# Altium PCB interface.PcbDoc (part 2 of 2)
Units mm, origin at the board's own origin, x right, y up, seen from the top; angles counter-clockwise.
Board outline 50 x 100 mm, 4 copper layers (Top Copper, GND, Supply, Bot Copper), stack 1.56 mm thick; 82 components, 62 nets, 291 pads, 101 vias.
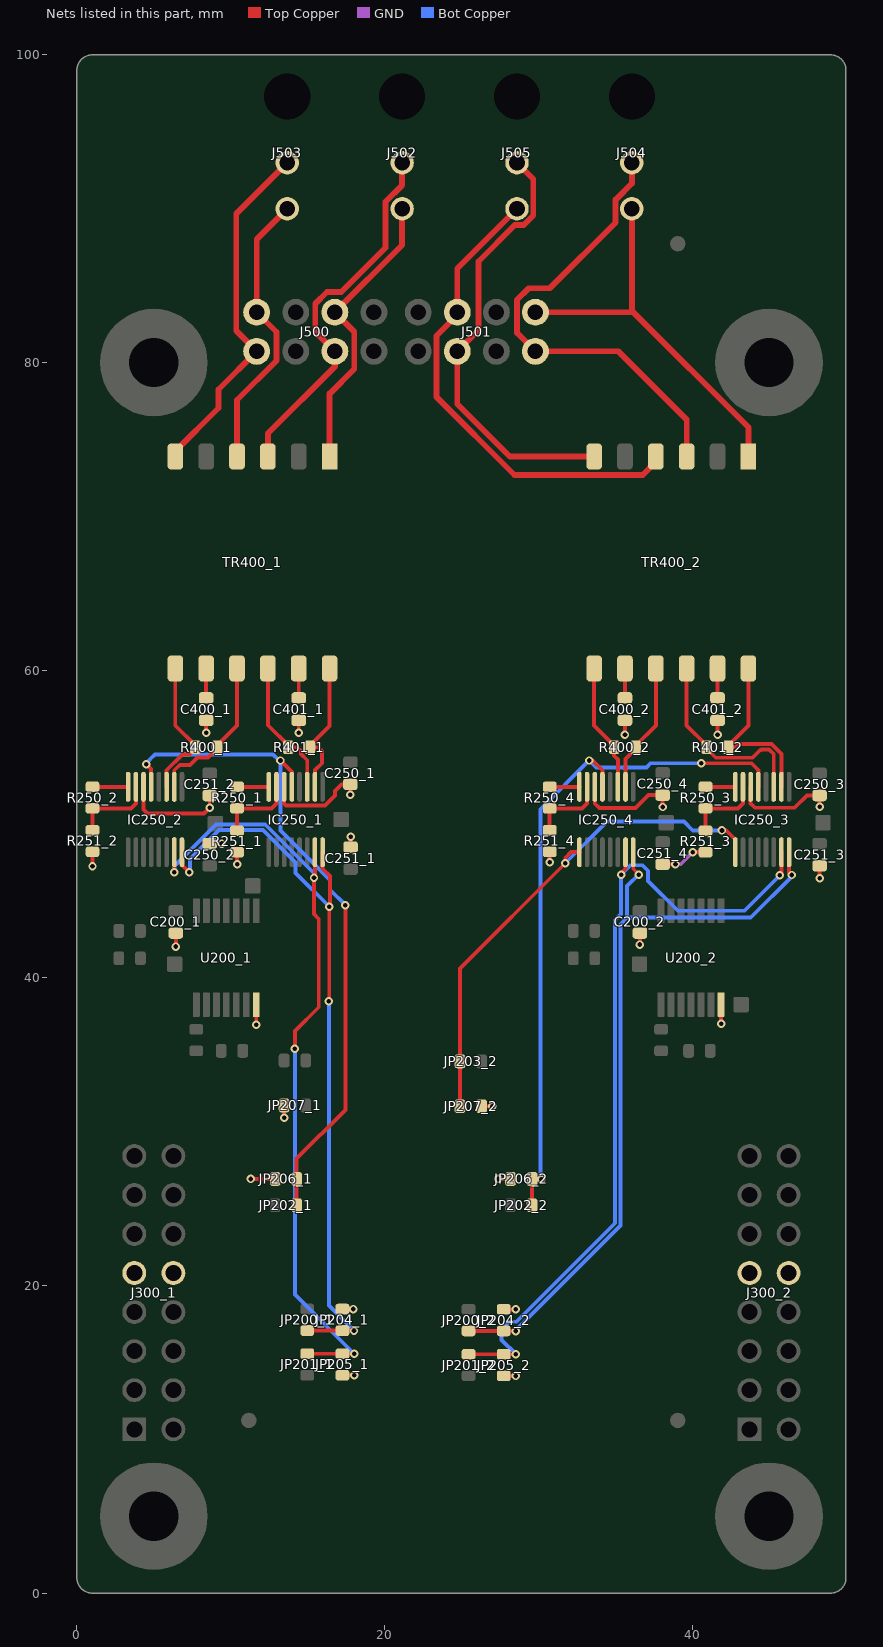
[diagram p4: the nets of this part, all layers, seen from the top]

## Via types
v1: diameter 0.55, hole 0.3, Top Copper to Bot Copper, tented both sides, 101 vias

## Nets (pads, with @x,y where several pads share a name; then routed paths per layer and width w, separated by ;. In a path a pad name is that pad's centre, name@x,y a point inside that pad or via, vN(x,y) a via of type N, cw(c..) or ccw(c..) an arc to the next point about the centre after c; other vN are vias at no path point) (continued)
EN-BACKUP_2: IC250_3.1 IC250_4.1 JP203_2.1 JP207_2.2 | length 33.5
  Top Copper w0.254: JP207_2.2@24.909,31.648 24.909,34.017 JP203_2.1@24.909,34.569 24.909,40.606 v1(31.75,47.447) 31.75,47.803 32.114,48.167 IC250_4.1@32.667,48.167 ; v1(41.935,49.581) 42.213,49.581 42.802,48.992 IC250_3.1@42.802,48.167
  Bot Copper w0.254: v1(31.75,47.447) 34.463,50.161 39.458,50.161 40.038,49.581 v1(41.935,49.581)
GND_0: C200_1.1 C250_1.1 C250_2.1 C251_1.1 C251_2.1 C400_1.1 C401_1.1 IC250_1.14 IC250_2.14 J300_1.9 J300_1.10 JP204_1.1 JP205_1.1 JP206_1.1 JP207_1.1 R251_1.1 R251_2.1 U200_1.7 | length 24.8
  Top Copper w0.254: v1(1.016,47.244) R251_2.1@1.016,48.195 ; IC250_2.14@4.33,52.417 4.33,50.939 4.596,50.673 8.255,50.673 v1(8.636,51.054) C251_2.1@8.636,51.853 C251_2.1@8.536,51.853 ; v1(6.43,42.034) C200_1.1@6.43,42.911 ; v1@8.404,55.88 v1(8.404,55.935) C400_1.1@8.404,56.743 ; C250_2.1@8.636,48.731 v1(9.423,48.731) 9.435,48.731 v1@9.449,48.717 ; v1(10.414,47.371) R251_1.1@10.414,48.167 R251_1.1@10.414,48.195 ; v1(11.303,26.924) JP206_1.1@12.889,26.924 ; v1(11.663,36.961) U200_1.7@11.663,38.261 ; v1@13.41,30.892 13.472,30.954 JP207_1.1@13.472,31.705 ; IC250_1.14@13.474,52.417 13.474,51.34 13.601,51.213 16.131,51.213 16.77,51.853 16.77,52.145 17.203,52.578 C250_1.1@17.78,52.578 v1(17.78,51.906) ; v1(14.423,55.935) C401_1.1@14.423,56.743 ; JP204_1.1@17.264,18.467 v1(17.975,18.467) ; JP205_1.1@17.278,14.149 JP205_1.1@17.264,14.163 v1(18.026,14.163) ; C251_1.1@17.795,48.502 v1(17.795,49.174)
  other v1: 13.472,30.892
GND_1: C200_2.1 C250_3.1 C250_4.1 C251_3.1 C251_4.1 C400_2.1 C401_2.1 IC250_3.14 IC250_4.14 J300_2.9 J300_2.10 JP204_2.1 JP205_2.1 JP206_2.1 JP207_2.1 R251_3.1 R251_4.1 U200_2.7 | length 25.1
  Top Copper w0.254: JP207_2.1@26.309,31.648 v1(27.006,31.648) ; v1(27.381,26.924) JP206_2.1@28.194,26.924 ; JP205_2.1@27.75,14.127 28.526,14.127 v1(28.537,14.116) ; JP204_2.1@27.75,18.448 28.551,18.448 v1@28.563,18.459 ; v1(30.738,47.52) R251_4.1@30.738,48.195 ; IC250_4.14@33.667,52.417 33.667,51.34 33.979,51.029 36.322,51.029 37.172,51.878 C250_4.1@38.075,51.878 v1(38.075,51.105) ; v1(35.63,55.808) C400_2.1@35.63,56.743 ; v1(36.602,42.164) C200_2.1@36.602,42.911 ; C251_4.1@38.075,47.383 v1(38.913,47.383) ; v1(40.039,48.167) R251_3.1@40.869,48.167 ; v1(41.649,55.808) C401_2.1@41.649,56.743 ; v1(41.882,37.024) U200_2.7@41.882,38.261 ; IC250_3.14@43.802,52.417 43.802,51.34 44.088,51.054 46.66,51.054 47.459,51.853 C250_3.1@48.285,51.853 v1(48.285,51.13) ; v1(48.285,46.482) C251_3.1@48.285,47.281
  GND w0.254: v1@28.512,14.141 v1(28.537,14.116) ; v1(38.913,47.383) 39.255,47.383 v1(40.039,48.167) ; v1@48.311,51.156 v1@48.336,51.13
  other v1: 28.537,18.459
NetC400_1_2: C400_1.2 TR400_1.8 | length 1.9
  Top Copper w0.254: C400_1.2@8.404,58.192 TR400_1.8@8.404,60.113
NetC400_2_2: C400_2.2 TR400_2.8 | length 1.9
  Top Copper w0.254: C400_2.2@35.63,58.192 TR400_2.8@35.63,60.113
NetC401_1_2: C401_1.2 TR400_1.11 | length 1.9
  Top Copper w0.254: C401_1.2@14.423,58.192 TR400_1.11@14.423,60.113
NetC401_2_2: C401_2.2 TR400_2.11 | length 1.9
  Top Copper w0.254: C401_2.2@41.649,58.192 TR400_2.11@41.649,60.113
NetIC250_1_15: IC250_1.15 R250_1.1 R251_1.2 | length 5.2
  Top Copper w0.254: R251_1.2@10.414,49.567 R250_1.1@10.414,51.017 12.651,51.017 12.974,51.34 IC250_1.15@12.974,52.417
NetIC250_1_16: IC250_1.16 R250_1.2 | length 2.1
  Top Copper w0.254: R250_1.2@10.414,52.417 IC250_1.16@12.474,52.417
NetIC250_2_15: IC250_2.15 R250_2.1 R251_2.2 | length 5.4
  Top Copper w0.254: R251_2.2@1.016,49.595 R250_2.1@1.016,51.017 3.507,51.017 3.83,51.34 IC250_2.15@3.83,52.417
NetIC250_2_16: IC250_2.16 R250_2.2 | length 2.3
  Top Copper w0.254: R250_2.2@1.016,52.417 IC250_2.16@3.33,52.417
NetIC250_3_15: IC250_3.15 R250_3.1 R251_3.2 | length 5.1
  Top Copper w0.254: R251_3.2@40.869,49.567 R250_3.1@40.869,51.017 42.978,51.017 43.302,51.34 IC250_3.15@43.302,52.417
NetIC250_3_16: IC250_3.16 R250_3.2 | length 1.9
  Top Copper w0.254: R250_3.2@40.869,52.417 IC250_3.16@42.802,52.417
NetIC250_4_15: IC250_4.15 R250_4.1 R251_4.2 | length 5.1
  Top Copper w0.254: R251_4.2@30.738,49.595 30.738,50.565 R250_4.1@30.738,51.017 32.844,51.017 33.167,51.34 IC250_4.15@33.167,52.417
NetIC250_4_16: IC250_4.16 R250_4.2 | length 1.9
  Top Copper w0.254: R250_4.2@30.738,52.417 IC250_4.16@32.667,52.417
OUT_1_N: IC250_1.10 R401_1.2 TR400_1.12 | length 9
  Top Copper w0.254: IC250_1.10@15.474,52.417 15.474,53.5 15.922,53.949 15.922,54.74 15.672,54.991 R401_1.2@15.146,54.991 15.146,55.091 16.43,56.375 TR400_1.12@16.43,60.113
OUT_1_P: IC250_1.11 R401_1.1 TR400_1.10 | length 9.1
  Top Copper w0.254: TR400_1.10@12.417,60.113 12.417,56.42 13.746,55.091 R401_1.1@13.746,54.991 14.326,54.991 14.568,54.749 14.568,54.549 14.974,54.142 IC250_1.11@14.974,52.417
OUT_2_N: IC250_2.10 R400_1.2 TR400_1.9 | length 10.2
  Top Copper w0.254: IC250_2.10@6.33,52.417 6.33,53.494 6.684,53.848 7.366,53.848 7.83,54.312 8.525,54.312 9.104,54.891 R400_1.2@9.104,54.991 9.104,55.091 10.41,56.398 TR400_1.9@10.41,60.113
OUT_2_P: IC250_2.11 R400_1.1 TR400_1.7 | length 9.3
  Top Copper w0.254: IC250_2.11@5.83,52.417 5.83,53.496 6.854,54.52 7.333,54.52 7.704,54.891 R400_1.1@7.704,54.991 7.704,55.091 6.397,56.398 TR400_1.7@6.397,60.113
OUT_3_N: IC250_3.10 R401_2.2 TR400_2.12 | length 11.6
  Top Copper w0.254: TR400_2.12@43.656,60.113 43.656,56.398 42.349,55.091 R401_2.2@42.349,54.991 42.801,54.991 43,55.19 45.153,55.19 45.802,54.541 IC250_3.10@45.802,52.417
OUT_3_P: IC250_3.11 R401_2.1 TR400_2.10 | length 12.8
  Top Copper w0.254: TR400_2.10@39.643,60.113 39.643,56.398 40.949,55.091 R401_2.1@40.949,54.991 40.949,54.891 41.535,54.305 43.924,54.305 44.428,54.809 44.479,54.809 44.504,54.834 45.005,54.834 45.302,54.538 IC250_3.11@45.302,52.417
OUT_4_N: IC250_4.10 R400_2.2 TR400_2.9 | length 8.5
  Top Copper w0.254: IC250_4.10@35.667,52.417 35.667,54.228 36.33,54.891 R400_2.2@36.33,54.991 36.33,55.091 37.636,56.398 TR400_2.9@37.636,60.113
OUT_4_P: IC250_4.11 R400_2.1 TR400_2.7 | length 8.3
  Top Copper w0.254: TR400_2.7@33.623,60.113 33.623,56.398 34.93,55.091 R400_2.1@34.93,54.991 34.93,54.439 35.167,54.202 IC250_4.11@35.167,52.417
OUT_primary_N: J500.4 J502.2 TR400_1.1 | length 19.1
  Top Copper w0.381: TR400_1.1@16.43,73.892 16.43,77.977 18.034,79.581 18.034,82.006 J500.4@16.77,83.27 21.144,87.644 J502.2@21.144,89.992
OUT_primary_P: J500.3 J502.1 TR400_1.3 | length 24.3
  Top Copper w0.381: TR400_1.3@12.417,73.892 12.417,75.381 16.77,79.734 J500.3@16.77,80.73 15.494,82.006 15.494,83.82 16.256,84.582 17.184,84.582 20.066,87.464 20.066,90.454 21.144,91.532 J502.1@21.144,92.989
OUT_reverse_primary_N: J500.8 J503.2 TR400_1.4 | length 18.5
  Top Copper w0.381: TR400_1.4@10.41,73.892 10.41,77.558 12.974,80.122 12.974,81.985 J500.8@11.69,83.27 11.689,88.006 J503.2@13.676,89.992
OUT_reverse_primary_P: J500.7 J503.1 TR400_1.6 | length 23.2
  Top Copper w0.381: TR400_1.6@6.397,73.892 6.397,74.242 9.203,77.047 9.203,78.243 J500.7@11.69,80.73 10.363,82.057 10.363,89.676 J503.1@13.676,92.989
OUT_reverse_secondary_N: J501.6 J505.2 TR400_2.4 | length 31.5
  Top Copper w0.381: J505.2@28.612,89.992 24.73,86.111 J501.6@24.73,83.27 24.73,83.093 23.368,81.731 23.368,77.775 28.451,72.692 36.785,72.692 37.636,73.543 TR400_2.4@37.636,73.892
OUT_reverse_secondary_P: J501.5 J505.1 TR400_2.6 | length 28.8
  Top Copper w0.381: J505.1@28.612,92.989 29.666,91.935 29.666,89.556 29.048,88.938 28.467,88.938 26.103,86.574 26.103,82.103 J501.5@24.73,80.73 24.73,77.311 28.149,73.892 TR400_2.6@33.623,73.892
OUT_secondary_N: J501.2 J504.2 TR400_2.1 | length 25.5
  Top Copper w0.381: J501.2@29.81,83.27 35.989,83.27 36.079,83.36 ; J504.2@36.079,89.992 36.079,83.36 ; TR400_2.1@43.656,73.892 43.656,75.784 36.079,83.36
OUT_secondary_P: J501.1 J504.1 TR400_2.3 | length 30.7
  Top Copper w0.381: J504.1@36.079,92.989 36.079,91.642 35.025,90.588 35.025,89.11 30.744,84.829 29.367,84.829 28.612,84.074 28.612,81.928 J501.1@29.81,80.73 35.193,80.73 39.643,76.28 TR400_2.3@39.643,73.892
PHA_1: IC250_1.8 IC250_2.8 JP200_1.1 JP204_1.2 | length 49.7
  Top Copper w0.254: IC250_2.8@6.83,48.167 6.83,47.342 v1(7.309,46.863) ; JP200_1.1@14.978,17.067 v1(18.015,17.067) ; IC250_1.8@15.974,48.167 15.974,47.09 16.455,46.609 v1@16.455,44.628 ; v1(16.383,38.481) 16.408,38.506 v1(16.408,44.628)
  Bot Copper w0.254: v1(7.309,46.863) 7.356,46.91 7.356,47.721 9.246,49.611 12.096,49.611 14.219,47.488 14.219,46.817 v1(16.408,44.628) ; v1(16.383,38.481) 16.383,18.699 v1(18.015,17.067) v1@18.015,17.039
PHA_2: IC250_3.8 IC250_4.8 JP200_2.1 JP204_2.2 | length 51.1
  Top Copper w0.254: JP200_2.1@25.464,17.048 27.198,17.048 JP204_2.2@27.75,17.048 28.526,17.048 v1(28.537,17.037) ; IC250_4.8@36.167,48.167 36.167,47.09 36.496,46.761 v1@36.525,46.761 ; IC250_3.8@46.302,48.167 46.302,46.866 v1(46.482,46.685)
  Bot Copper w0.254: v1(28.537,17.037) 28.537,17.101 35.333,23.897 35.333,43.476 35.774,43.917 ; v1(36.525,46.711) 35.774,45.96 35.774,43.917 ; v1@36.525,46.761 v1@36.525,46.787 ; v1(46.482,46.685) 46.482,46.591 43.807,43.917 35.774,43.917
POL_1: IC250_1.7 IC250_2.7 JP201_1.1 JP205_1.2 | length 51.3
  Top Copper w0.254: v1@6.33,47.09 IC250_2.7@6.33,48.167 ; v1(14.172,35.388) 14.172,36.536 15.723,38.087 15.723,43.837 15.415,44.145 v1(15.415,46.494) 15.474,46.553 IC250_1.7@15.474,48.167 ; JP201_1.1@14.978,15.563 16.712,15.563 JP205_1.2@17.264,15.563 18.009,15.563 v1@18.026,15.546
  Bot Copper w0.254: v1@6.35,46.863 6.35,47.276 9.041,49.967 12.244,49.967 15.415,46.796 v1(15.415,46.494) ; v1(14.172,35.388) 14.172,19.417 v1(18.026,15.563)
  other v1: 6.33,46.863
POL_2: IC250_3.7 IC250_4.7 JP201_2.1 JP205_2.2 | length 54.5
  Top Copper w0.254: JP201_2.1@25.464,15.527 27.198,15.527 JP205_2.2@27.75,15.527 28.602,15.527 v1@28.613,15.538 ; v1(35.382,46.711) 35.382,46.806 35.667,47.09 IC250_4.7@35.667,48.167 ; v1(45.695,46.66) 45.802,46.767 IC250_3.7@45.802,48.167
  Bot Copper w0.254: v1(28.537,15.538) 27.612,16.464 27.612,17.156 28.098,17.642 28.576,17.642 34.978,24.044 34.978,43.754 35.382,44.158 v1(35.382,46.711) 35.987,47.316 36.776,47.316 37.13,46.961 37.13,46.307 39.076,44.361 43.396,44.361 v1(45.695,46.66)
SLOW_1: IC250_1.13 IC250_2.13 JP202_1.1 JP206_1.2 | length 44.8
  Top Copper w0.254: v1(4.521,53.873) 4.83,53.565 IC250_2.13@4.83,52.417 ; v1(13.233,54.127) 13.974,53.387 IC250_1.13@13.974,52.417 ; JP202_1.1@14.289,25.22 14.289,26.372 JP206_1.2@14.289,26.924 14.289,28.259 17.45,31.42 v1(17.45,44.729)
  Bot Copper w0.254: v1(4.521,53.873) 4.521,53.953 4.729,54.161 4.729,54.175 5.083,54.529 12.751,54.529 13.153,54.127 v1(13.233,54.127) 13.233,49.568 16.451,46.35 16.451,45.728 v1(17.45,44.729)
SLOW_2: IC250_3.13 IC250_4.13 JP202_2.1 JP206_2.2 | length 45.6
  Top Copper w0.254: JP202_2.1@29.594,25.22 29.594,25.771 JP206_2.2@29.594,26.924 30.179,26.924 v1(30.19,26.913) ; v1(33.299,54.127) 33.533,54.127 34.167,53.494 IC250_4.13@34.167,52.417 ; v1(40.589,53.95) 43.846,53.95 44.302,53.494 IC250_3.13@44.302,52.417
  Bot Copper w0.254: v1(30.19,26.913) 30.133,26.971 30.133,50.961 v1(33.299,54.127) 33.322,54.127 33.774,53.675 37.02,53.675 37.295,53.95 v1(40.589,53.95)
pads on no net: Designator11.Hole_3.2 Designator12.Hole_3.2 Designator13.Hole_3.2 Designator14.Hole_3.2 Designator38.0 Designator39.0 Designator40.0 J300_1.2 J300_1.11 J300_1.12 J300_1.13 J300_1.14 J300_1.15 J300_1.16 J300_2.2 J300_2.11 J300_2.12 J300_2.13 J300_2.14 J300_2.15 J300_2.16 J500.1 J500.2 J500.5 J500.6 J501.3 J501.4 J501.7 J501.8 J502. J503. J504. J505. TR400_1.2 TR400_1.5 TR400_2.2 TR400_2.5

## Polygon pours and split planes (outlines as drawn)
no net on Bottom Overlay "Polygon_10_NoNet" (solid): 17.279,34.283 17.279,34.578 15.874,34.577 15.875,34.282
no net on Bottom Overlay "Polygon_9_NoNet" (solid): 17.279,34.916 17.279,35.2 15.874,35.2 15.876,34.917
no net on Bottom Overlay "Polygon_8_NoNet" (solid): 17.002,36.272 17.256,36.295 17.281,36.198 17.3,36.097 17.303,36.054 17.3,35.889 17.278,35.781 17.237,35.676 17.177,35.599 17.088,35.535 17.005,35.501 16.931,35.491 16.795,35.489 16.712,35.518 16.642,35.56 16.563,35.648 16.51,35.736 16.462,35.841 16.43,35.923 16.39,35.998 16.347,36.045 16.322,36.065 16.288,36.073 16.221,36.074 16.169,36.043 16.13,35.999 16.109,35.95 16.093,35.905 16.09,35.846 16.097,35.76 16.112,35.696 16.128,35.644 16.149,35.608 16.177,35.539 15.907,35.515 15.882,35.598 15.862,35.703 15.852,35.769 15.852,35.955 15.872,36.064 15.921,36.177 15.967,36.253 16.038,36.317 16.126,36.354 16.22,36.377 16.351,36.375 16.466,36.344 16.562,36.269 16.641,36.165 16.701,36.026 16.747,35.92 16.777,35.857 16.835,35.802 16.869,35.791 16.958,35.8 17.023,35.85 17.059,35.913 17.061,36.067 17.045,36.141
no net on Bottom Overlay "Polygon_7_NoNet" (solid): 17.04,37.091 17.042,37.141 17.016,37.2 16.985,37.246 16.945,37.27 16.84,37.274 16.814,37.266 16.788,37.247 16.762,37.21 16.738,37.161 16.724,37.095 16.724,36.962 16.492,36.976 16.495,37.151 16.471,37.212 16.425,37.274 16.381,37.302 16.353,37.313 16.247,37.313 16.204,37.294 16.165,37.259 16.141,37.202 16.118,37.142 16.118,36.955 15.877,36.949 15.878,37.178 15.89,37.28 15.959,37.458 16.088,37.575 16.261,37.612 16.394,37.594 16.493,37.544 16.563,37.46 16.603,37.369 16.609,37.331 16.626,37.384 16.685,37.473 16.774,37.538 16.868,37.564 16.966,37.564 17.094,37.529 17.181,37.473 17.247,37.36 17.277,37.242 17.283,37.081 17.281,36.644 15.875,36.646 15.876,36.949 16.117,36.955 16.117,36.931 16.49,36.934 16.49,36.976 16.723,36.962 16.723,36.936 17.038,36.929
no net on Bottom Overlay "Polygon_22_NoNet" (solid): 14.03,62.802 13.89,62.778 13.784,62.709 13.715,62.603 13.691,62.464 13.691,60.04 13.715,59.9 13.784,59.794 13.89,59.726 14.03,59.701 14.302,59.646 14.525,59.495 14.676,59.272 14.731,59 14.731,58.481 14.76,58.342 14.837,58.235 14.945,58.166 15.069,58.142 24.547,58.142 24.578,57.778 15.068,57.778 14.928,57.792 14.796,57.833 14.677,57.898 14.573,57.984 14.487,58.088 14.422,58.207 14.381,58.339 14.367,58.479 14.367,58.998 14.342,59.138 14.274,59.244 14.167,59.313 14.028,59.337 13.887,59.351 13.756,59.393 13.637,59.457 13.533,59.543 13.447,59.647 13.382,59.766 13.341,59.898 13.326,60.038 13.326,62.465 13.34,62.607 13.381,62.74 13.444,62.86 13.529,62.963 13.633,63.048 13.753,63.112 13.885,63.152 14.027,63.166 14.167,63.192 14.274,63.264 14.342,63.371 14.367,63.504 14.367,64.024 14.381,64.164 14.422,64.296 14.487,64.415 14.573,64.52 14.677,64.605 14.796,64.67 14.928,64.711 15.068,64.725 34.14,64.725 34.3,64.713 34.442,64.675 34.562,64.614 34.662,64.532 34.74,64.43 34.796,64.31 34.831,64.174 34.842,64.024 34.842,58.479 34.828,58.339 34.787,58.207 34.722,58.088 34.636,57.984 34.532,57.898 34.412,57.833 34.281,57.792 34.14,57.778 24.578,57.778 24.547,58.142 34.138,58.142 34.278,58.166 34.385,58.235 34.453,58.341 34.478,58.48 34.478,64.022 34.453,64.162 34.385,64.268 34.278,64.337 34.14,64.361 15.07,64.361 14.93,64.337 14.824,64.268 14.755,64.162 14.731,64.024 14.731,63.503 14.676,63.231 14.525,63.008 14.302,62.857
no net on Bottom Overlay "Polygon_45_NoNet" (solid, pour order 1): 33.47,7.144 33.466,7.206 33.454,7.26 33.433,7.306 33.404,7.344 33.366,7.374 33.32,7.395 33.267,7.408 33.206,7.411 33.145,7.408 33.092,7.395 33.046,7.374 33.008,7.344 32.979,7.306 32.958,7.26 32.946,7.206 32.941,7.144 32.946,7.083 32.958,7.03 32.979,6.984 33.008,6.946 33.046,6.917 33.092,6.896 33.145,6.884 33.206,6.88 33.267,6.884 33.32,6.896 33.366,6.917 33.404,6.946 33.433,6.984 33.454,7.03 33.466,7.083
no net on Bottom Overlay "Polygon_44_NoNet" (solid, pour order 6): 32.706,6.681 32.706,5.928 32.913,5.928 32.913,5.051 33.499,5.051 33.499,5.928 33.706,5.928 33.706,6.681 33.696,6.729 33.668,6.771 33.626,6.799 33.578,6.808 32.834,6.808 32.787,6.799 32.745,6.771 32.716,6.73
no net on Bottom Overlay "Polygon_43_NoNet" (solid, pour order 16): 33.231,8.051 33.021,8.042 32.841,8.017 32.668,7.976 32.503,7.919 32.345,7.845 32.195,7.754 32.052,7.647 31.917,7.524 31.793,7.388 31.685,7.245 31.594,7.094 31.519,6.936 31.461,6.771 31.42,6.598 31.395,6.418 31.387,6.231 31.395,6.044 31.419,5.864 31.46,5.693 31.517,5.529 31.59,5.373 31.68,5.226 31.785,5.086 31.907,4.955 32.048,4.828 32.195,4.717 32.349,4.624 32.508,4.548 32.674,4.489 32.846,4.446 33.025,4.421 33.209,4.412 33.39,4.421 33.565,4.446 33.735,4.488 33.898,4.546 34.055,4.622 34.206,4.714 34.35,4.823 34.489,4.948 34.614,5.086 34.723,5.229 34.815,5.38 34.891,5.537 34.949,5.701 34.991,5.871 35.016,6.048 35.025,6.231 35.016,6.415 34.991,6.592 34.949,6.763 34.891,6.928 34.815,7.087 34.723,7.239 34.614,7.384 34.489,7.524 34.354,7.647 34.212,7.754 34.062,7.845 33.906,7.919 33.742,7.976 33.572,8.017 33.394,8.042 33.272,8.052 33.208,8.05 33.225,7.698 33.352,7.692 33.496,7.672 33.634,7.639 33.766,7.592 33.892,7.532 34.012,7.459 34.126,7.371 34.235,7.271 34.338,7.157 34.427,7.038 34.502,6.915 34.564,6.787 34.612,6.655 34.646,6.519 34.667,6.378 34.674,6.232 34.667,6.086 34.647,5.944 34.613,5.808 34.565,5.677 34.504,5.551 34.429,5.43 34.341,5.313 34.239,5.202 34.128,5.1 34.011,5.012 33.89,4.937 33.763,4.876 33.631,4.828 33.494,4.794 33.351,4.774 33.203,4.767 33.056,4.774 32.914,4.794 32.776,4.828 32.644,4.876 32.516,4.937 32.393,5.013 32.274,5.102 32.161,5.205 32.062,5.309 31.976,5.421 31.903,5.539 31.844,5.664 31.798,5.795 31.765,5.934 31.745,6.079 31.738,6.231 31.745,6.381 31.765,6.525 31.798,6.663 31.845,6.796 31.905,6.923 31.979,7.044 32.066,7.16 32.166,7.27 32.276,7.371 32.392,7.458 32.513,7.532 32.639,7.592 32.772,7.639 32.909,7.672 33.053,7.692 33.185,7.699 33.25,7.697
no net on Bottom Overlay "Polygon_39_NoNet" (solid, pour order 2): 36.346,6.526 36.607,6.389 36.656,6.465 36.705,6.507 36.757,6.53 36.807,6.538 36.86,6.533 36.907,6.519 36.946,6.495 36.977,6.463 37.003,6.42 37.02,6.369 37.032,6.305 37.036,6.232 37.032,6.165 37.021,6.105 37.003,6.052 36.976,6.006 36.944,5.971 36.905,5.945 36.86,5.93 36.806,5.925 36.737,5.934 36.679,5.961 36.632,6.007 36.589,6.083 36.339,5.959 36.388,5.883 36.436,5.827 36.49,5.777 36.551,5.735 36.617,5.701 36.686,5.677 36.757,5.662 36.832,5.657 36.951,5.667 37.057,5.695 37.151,5.743 37.233,5.809 37.299,5.893 37.346,5.991 37.374,6.104 37.383,6.231 37.374,6.355 37.345,6.467 37.297,6.565 37.23,6.65 37.148,6.717 37.055,6.766 36.953,6.795 36.842,6.805 36.759,6.801 36.683,6.788 36.613,6.768 36.548,6.738 36.49,6.7 36.438,6.654 36.392,6.6
no net on Bottom Overlay "Polygon_38_NoNet" (solid, pour order 3): 37.388,6.526 37.652,6.389 37.701,6.465 37.75,6.507 37.801,6.53 37.848,6.538 37.902,6.533 37.949,6.519 37.987,6.495 38.019,6.463 38.044,6.422 38.062,6.369 38.073,6.305 38.077,6.233 38.062,6.103 38.045,6.052 38.018,6.006 37.986,5.971 37.947,5.945 37.901,5.93 37.848,5.925 37.778,5.934 37.72,5.961 37.674,6.007 37.63,6.083 37.385,5.959 37.431,5.884 37.478,5.827 37.532,5.777 37.593,5.735 37.659,5.701 37.729,5.677 37.801,5.662 37.877,5.657 37.994,5.667 38.1,5.695 38.194,5.743 38.276,5.809 38.343,5.893 38.391,5.991 38.419,6.104 38.428,6.231 38.419,6.355 38.39,6.467 38.342,6.565 38.275,6.65 38.193,6.717 38.101,6.766 37.998,6.795 37.887,6.805 37.804,6.801 37.728,6.788 37.657,6.768 37.593,6.738 37.534,6.701 37.481,6.654 37.435,6.6
no net on Bottom Overlay "Polygon_37_NoNet" (solid, pour order 14): 37.397,8.05 37.203,8.042 37.023,8.017 36.85,7.975 36.684,7.917 36.525,7.842 36.373,7.75 36.228,7.642 36.091,7.517 35.97,7.384 35.865,7.242 35.775,7.091 35.701,6.931 35.643,6.764 35.601,6.591 35.576,6.414 35.568,6.231 35.576,6.047 35.601,5.87 35.642,5.697 35.699,5.531 35.773,5.373 35.862,5.224 35.967,5.085 36.088,4.955 36.225,4.831 36.372,4.722 36.527,4.629 36.692,4.552 36.862,4.491 37.035,4.447 37.211,4.421 37.39,4.412 37.568,4.421 37.743,4.447 37.913,4.49 38.08,4.55 38.241,4.627 38.393,4.719 38.536,4.827 38.671,4.95 38.794,5.085 38.901,5.228 38.993,5.379 39.069,5.539 39.129,5.705 39.171,5.876 39.197,6.052 39.205,6.231 39.197,6.41 39.171,6.585 39.128,6.757 39.068,6.925 38.991,7.087 38.898,7.24 38.79,7.385 38.667,7.521 38.533,7.645 38.392,7.752 38.243,7.843 38.087,7.918 37.924,7.976 37.753,8.017 37.576,8.042 37.456,8.05 37.397,8.05 37.399,7.701 37.533,7.692 37.678,7.672 37.816,7.639 37.948,7.592 38.074,7.532 38.194,7.458 38.308,7.371 38.416,7.271 38.515,7.16 38.603,7.043 38.678,6.92 38.741,6.79 38.791,6.655 38.826,6.517 38.847,6.376 38.854,6.232 38.847,6.089 38.826,5.949 38.791,5.812 38.741,5.677 38.678,5.547 38.603,5.424 38.516,5.309 38.417,5.2 38.308,5.102 38.192,5.015 38.07,4.942 37.94,4.88 37.806,4.832 37.669,4.797 37.528,4.777 37.384,4.77 37.241,4.777 37.101,4.798 36.962,4.832 36.826,4.881 36.694,4.944 36.569,5.018 36.45,5.105 36.338,5.204 36.24,5.31 36.155,5.422 36.083,5.54 36.024,5.665 35.978,5.796 35.945,5.935 35.925,6.079 35.919,6.231 35.926,6.377 35.946,6.52 35.98,6.659 36.027,6.793 36.088,6.922 36.161,7.044 36.246,7.159 36.344,7.267 36.454,7.368 36.57,7.456 36.692,7.53 36.819,7.591 36.952,7.638 37.09,7.672 37.234,7.692 37.334,7.701 37.399,7.702
no net on Bottom Overlay "Polygon_42_NoNet" (solid, pour order 0): 33.47,7.144 33.466,7.206 33.454,7.26 33.433,7.306 33.404,7.344 33.366,7.374 33.32,7.395 33.267,7.408 33.206,7.411 33.145,7.408 33.092,7.395 33.046,7.374 33.008,7.344 32.979,7.306 32.958,7.26 32.946,7.206 32.941,7.144 32.946,7.083 32.958,7.03 32.979,6.984 33.008,6.946 33.046,6.917 33.092,6.896 33.145,6.884 33.206,6.88 33.267,6.884 33.32,6.896 33.366,6.917 33.404,6.946 33.433,6.984 33.454,7.03 33.466,7.083
no net on Bottom Overlay "Polygon_41_NoNet" (solid, pour order 7): 32.706,6.681 32.706,5.928 32.913,5.928 32.913,5.051 33.499,5.051 33.499,5.928 33.706,5.928 33.706,6.681 33.696,6.729 33.668,6.771 33.626,6.799 33.578,6.808 32.834,6.808 32.787,6.799 32.745,6.771 32.716,6.73
no net on Bottom Overlay "Polygon_40_NoNet" (solid, pour order 15): 33.208,8.05 33.021,8.042 32.841,8.017 32.668,7.976 32.503,7.919 32.345,7.845 32.195,7.754 32.052,7.647 31.917,7.524 31.793,7.388 31.685,7.245 31.594,7.094 31.519,6.936 31.461,6.771 31.42,6.598 31.395,6.418 31.387,6.231 31.395,6.044 31.419,5.864 31.46,5.693 31.517,5.529 31.59,5.373 31.68,5.226 31.785,5.086 31.907,4.955 32.048,4.828 32.195,4.717 32.349,4.624 32.508,4.548 32.674,4.489 32.846,4.446 33.025,4.421 33.209,4.412 33.39,4.421 33.565,4.446 33.735,4.488 33.898,4.546 34.055,4.622 34.206,4.714 34.35,4.823 34.489,4.948 34.614,5.086 34.723,5.229 34.815,5.38 34.891,5.537 34.949,5.701 34.991,5.871 35.016,6.048 35.025,6.231 35.016,6.415 34.991,6.592 34.949,6.763 34.891,6.928 34.815,7.087 34.723,7.239 34.614,7.384 34.489,7.524 34.354,7.647 34.212,7.754 34.062,7.845 33.906,7.919 33.742,7.976 33.572,8.017 33.394,8.042 33.272,8.052 33.208,8.05 33.225,7.698 33.352,7.692 33.496,7.672 33.634,7.639 33.766,7.592 33.892,7.532 34.012,7.459 34.126,7.371 34.235,7.271 34.338,7.157 34.427,7.038 34.502,6.915 34.564,6.787 34.612,6.655 34.646,6.519 34.667,6.378 34.674,6.232 34.667,6.086 34.647,5.944 34.613,5.808 34.565,5.677 34.504,5.551 34.429,5.43 34.341,5.313 34.239,5.202 34.128,5.1 34.011,5.012 33.89,4.937 33.763,4.876 33.631,4.828 33.494,4.794 33.351,4.774 33.203,4.767 33.056,4.774 32.914,4.794 32.776,4.828 32.644,4.876 32.516,4.937 32.393,5.013 32.274,5.102 32.161,5.205 32.062,5.309 31.976,5.421 31.903,5.539 31.844,5.664 31.798,5.795 31.765,5.934 31.745,6.079 31.738,6.231 31.745,6.381 31.765,6.525 31.798,6.663 31.845,6.796 31.905,6.923 31.979,7.044 32.066,7.16 32.166,7.27 32.276,7.371 32.392,7.458 32.513,7.532 32.639,7.592 32.772,7.639 32.909,7.672 33.053,7.692 33.185,7.699 33.225,7.698
GND_0 on GND "Polygon_1_Net_GND_0" (solid, remove dead copper, pour order 46): -0.076,-0.076 -0.076,57.406 18.669,57.406 18.674,-0.076
GND_1 on GND "Polygon_1_Net_GND_1" (solid, remove dead copper, pour order 48): 22.826,-0.076 22.783,57.407 50.076,57.406 50.076,-0.076
no net on Top Overlay "Polygon_22_NoNet" (solid): 34.718,6.795 34.858,6.77 34.964,6.702 35.033,6.595 35.057,6.457 35.057,4.033 35.033,3.893 34.964,3.786 34.858,3.718 34.718,3.693 34.447,3.638 34.223,3.488 34.072,3.264 34.017,2.993 34.017,2.473 33.988,2.334 33.911,2.227 33.803,2.159 33.679,2.134 24.201,2.134 24.17,1.77 33.68,1.77 33.82,1.784 33.952,1.825 34.071,1.891 34.175,1.976 34.261,2.08 34.326,2.199 34.367,2.331 34.382,2.472 34.381,2.99 34.406,3.131 34.474,3.237 34.581,3.305 34.72,3.33 34.861,3.344 34.992,3.385 35.111,3.45 35.216,3.535 35.301,3.64 35.366,3.759 35.407,3.89 35.422,4.031 35.422,6.457 35.408,6.6 35.367,6.733 35.304,6.852 35.219,6.955 35.115,7.041 34.996,7.105 34.863,7.144 34.721,7.158 34.581,7.185 34.475,7.256 34.406,7.364 34.382,7.496 34.382,8.016 34.367,8.157 34.326,8.288 34.261,8.408 34.175,8.512 34.071,8.598 33.952,8.662 33.82,8.704 33.68,8.718 14.608,8.718 14.448,8.705 14.306,8.668 14.186,8.607 14.086,8.524 14.008,8.423 13.952,8.302 13.917,8.166 13.906,8.016 13.906,2.472 13.92,2.331 13.961,2.199 14.026,2.08 14.112,1.976 14.216,1.891 14.336,1.825 14.467,1.784 14.608,1.77 24.17,1.77 24.201,2.134 14.61,2.134 14.47,2.159 14.363,2.227 14.295,2.333 14.27,2.472 14.27,8.014 14.295,8.154 14.363,8.261 14.47,8.329 14.608,8.354 33.678,8.354 33.818,8.329 33.924,8.261 33.993,8.154 34.017,8.016 34.017,7.495 34.072,7.224 34.223,7 34.447,6.85
+3.3V_0 on Supply "Polygon_1_Net_+3.3V_0" (solid, remove dead copper, pour order 45): -0.076,-0.076 -0.076,57.406 18.669,57.406 18.669,-0.076
+3.3V_1 on Supply "Polygon_1_Net_+3.3V_1" (solid, remove dead copper, pour order 47): 22.826,-0.076 22.783,57.407 50.076,57.406 50.076,-0.076

## Keep-outs
Top Copper:
  rectangle: 20.4,40.2 29.6,62
Keep-Out Layer:
  lines w0: 0,1 0,99 cw(c1,99) 1,100 49,100 cw(c49,99) 50,99 50,1 cw(c49,1) 49,0 1,0

## Silkscreen, mask and mechanical layers (free items; w line width, h text height)
Top Overlay:
  drawing of 73 lines, arcs and shapes, not listed
  text "Enable" at 25.956,36.488 h1.27
  text "Enable" at 14.75,36.463 h1.27
  text "High" at 27.155,34.257 h1.27
  text "High" at 15.909,34.238 h1.27
  text "Low" at 16.077,31.332 h1.27
  text "Low" at 27.372,31.314 h1.27
  text "Slow" at 24.581,28.175 h1.2
  text "Slow" at 15.76,28.136 h1.2
  text "Low" at 16.064,26.534 h1.27
  text "Low" at 24.619,26.525 h1.27
  text "High" at 15.909,24.982 h1.27
  text "High" at 24.606,24.983 h1.27
  text "SPI CLK" at 26.607,19.78 h1.27
  text "SPI CLK" at 12.057,19.618 h1.27
  text "Phase" at 29.533,17.464 h1.27
  text "Phase" at 10.279,17.293 h1.27
  text "Pol." at 30.155,14.543 h1.27
  text "Pol." at 10.901,14.481 h1.27
  text "HI" at 14.399,11.94 h1.27
  text "LO" at 16.679,11.932 h1.27
  text "HI" at 24.956,11.906 h1.27
  text "LO" at 27.242,11.906 h1.27
  text "Clicky" at 15.486,6.008 h1.52
  text "Interface" at 20.566,2.901 h1.52
Bottom Overlay:
  text "PRIMARY" at 19.874,94.41 h1.27
  text "SECONDARY" at 35.918,94.41 h1.27
  text "P" at 38.941,92.652 h1.27
  text "N" at 38.941,89.604 h1.27
  text "reverse" at 15.508,87.938 h1.27
  text "reverse" at 30.444,87.938 h1.27
  text "forward" at 22.989,87.826 h1.27
  text "forward" at 37.925,87.826 h1.27
  text "WARNING: Do not exceed 600V pack voltage with connected reverse isoSPI!" at 43,65.82 h2
  text "Clicky" at 32.317,62.3 h1.52
  text "Interface" at 28.71,59.174 h1.52
  text "foxBMS BMS-Interface v'.GlobalVersion'" at 31.496,56.388 h1.27
  text "Creative Commons" at 39.216,3.15 h1.2
  text "Attribution 4.0" at 39.216,1.93 h1.2
Mechanical 1:
  the board outline again, w0
Mechanical 21:
  lines w0: 5,5 45,5 45,80 5,80

## Dimensions
50,1 to 0,1.729 on Board_Outline
48.045,100 to 48.044,-0.022 on Board_Outline
45,80 to 39.559,99.507 on Board_Outline
5,80 to 10.196,99.507 on Board_Outline
5,80 to 45,80 on Board_Outline
45,80 to 45,5 on Mechanical 7
45,5 to 5,5 on Mechanical 7

## Text inside footprints (layer, text, board x,y; h text height)
Designator23: Top Copper "1" at 4.402,93.548 h0.51 r270; GND "2" at 4.402,92.38 h0.51 r270; Bot Copper "4" at 4.402,89.509 h0.51 r270; Supply "3" at 4.402,91.11 h0.51 r270